# Altium PCB rf practical board.PcbDoc (part 2 of 2)
Units mm, origin at the board's own origin, x right, y up, seen from the top; angles counter-clockwise.
Board outline 70.56 x 65.43 mm, 4 copper layers (L1, L2, L3, L4), stack 0.603 mm thick; 77 components, 60 nets, 362 pads, 171 vias.
Unrouted connection lines stored in the file: 193.
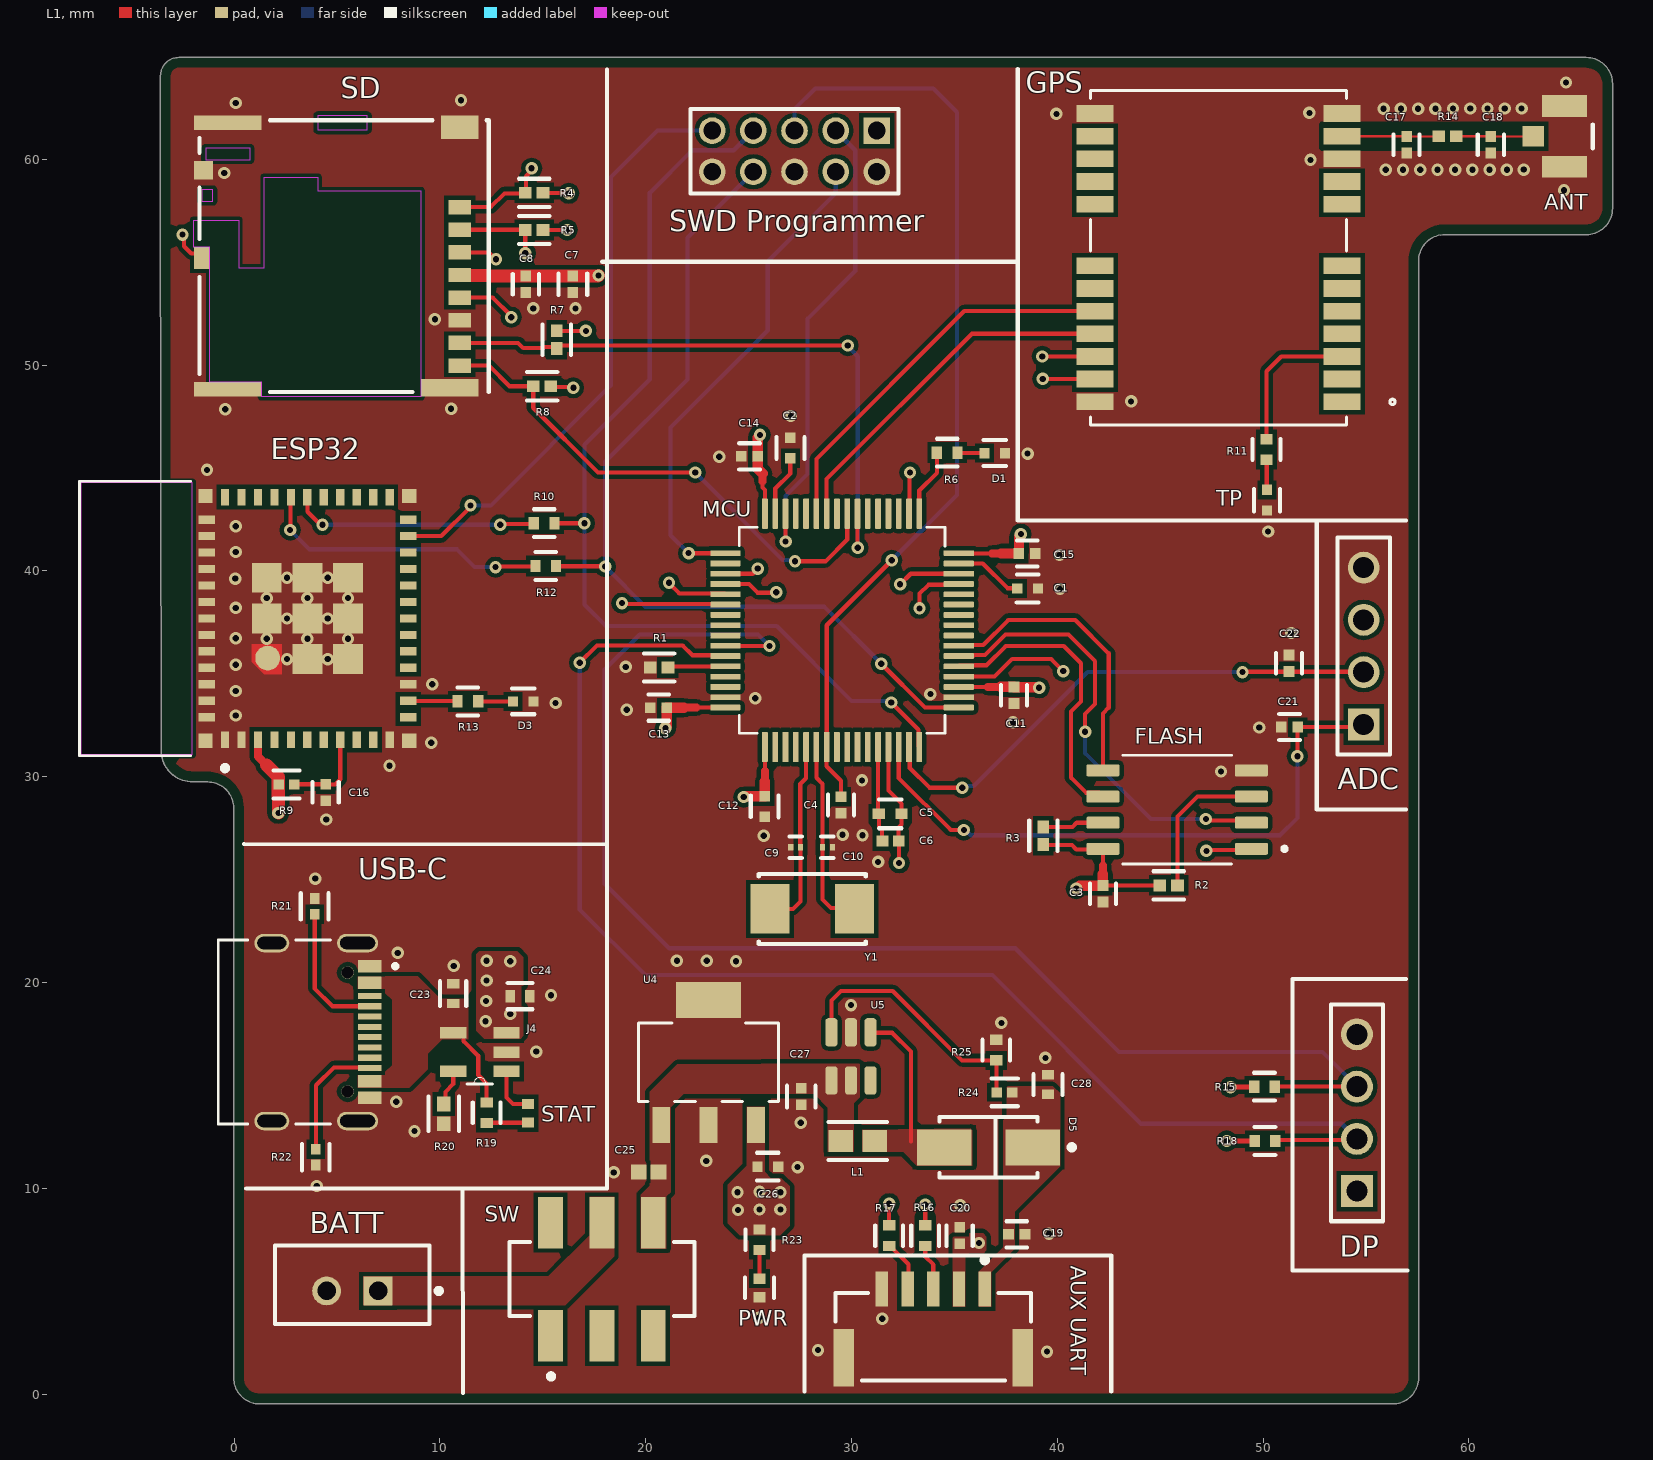
[diagram p0: L1 view]

## Via types
v1: diameter 0.6, hole 0.3, L1 to L4, tented both sides, 151 vias
v2: diameter 0.6, hole 0.3, L1 to L4, 20 vias

## Nets (pads, with @x,y where several pads share a name; then routed paths per layer and width w, separated by ;. In a path a pad name is that pad's centre, name@x,y a point inside that pad or via, vN(x,y) a via of type N, cw(c..) or ccw(c..) an arc to the next point about the centre after c; other vN are vias at no path point) (continued)
NetP3_3: (continued)
  L4 w0.203: v1(26.01,36.347) 25.451,36.906 19.71,36.906 18.009,35.205 18.009,24.79 21.138,21.661 37.952,21.661 43.002,16.612 52.883,16.612 DP.3
NetR1_1: MCU.60 R1.1 | length 2.9
  L1 w0.203: R1.1@20.952,35.306 21.005,35.359 MCU.60
NetR2_2: FLASH.3 R2.2 | length 7.3
  L1 w0.203: R2.2 45.841,28.061 46.812,29.032 FLASH.3
NetR3_2: FLASH.7 R3.2 | length 3
  L1 w0.203: R3.2 40.738,27.556 40.945,27.762 FLASH.7
NetR6_1: MCU.33 R6.1 | length 3.3
  L1 w0.203: MCU.33 33.29,43.907 34.146,44.763 R6.1
NetR11_2: GPS.3 R11.2 | length 7.3
  L1 w0.203: R11.2 50.165,49.702 50.883,50.42 GPS.3
NetR16_2: MCU.29 R16.2 | length 35.3
  L1 w0.203: v1(33.299,38.176) 33.308,38.185 33.308,38.896 33.733,39.321 35.172,39.321 MCU.29 ; R16.2@33.579,8.145 v1(33.579,9.195)
  L3 w0.203: v1(33.299,38.176) 33.299,36.093 36.428,32.964 36.428,12.044 v1(33.579,9.195)
NetR17_2: MCU.30 R17.2 | length 36.2
  L1 w0.203: R17.2 v1(31.826,9.246) ; v1(32.36,39.345) 32.874,39.859 MCU.30
  L3 w0.203: v1(31.826,9.246) 34.438,11.857 34.438,32.212 32.36,34.29 v1(32.36,39.345)
NetR24_1: R24.1 R25.2 U5.3 | length 12.7
  L1 w0.203: U5.3 29.022,19.116 29.489,19.583 32.004,19.583 35.374,16.213 R25.2 37.047,16.199 37.047,14.67 R24.1
NetU1_20: FLASH.1 MCU.20 | length 22.6
  L1 w0.203: MCU.20 36.953,34.859 37.806,35.712 39.7,35.712 v1(40.284,35.128) ; v1(47.244,26.391) 47.295,26.441 49.376,26.441 FLASH.1
  L3 w0.203: v1(40.284,35.128) 40.335,35.179 44.856,35.179 46.126,33.909 46.126,27 46.736,26.391 v1(47.244,26.391)
NetU1_21: FLASH.6 MCU.21 | length 14.4
  L1 w0.203: MCU.21 35.249,35.398 35.946,35.398 35.963,35.415 36.564,35.415 37.497,36.347 40.31,36.347 41.148,35.509 41.148,33.655 40.665,33.172 40.665,29.949 41.394,29.221 42.028,29.221 FLASH.6
NetU1_22: FLASH.2 MCU.22 | length 21.7
  L1 w0.203: MCU.22 35.249,35.898 35.946,35.898 35.963,35.915 36.489,35.915 37.481,36.906 40.538,36.906 41.834,35.611 41.834,33.528 41.351,33.045 v1(41.351,32.182) ; v1(47.219,27.94) 47.295,27.864 49.325,27.864 FLASH.2
  L4 w0.203: v1(41.351,32.182) 41.351,31.14 44.552,27.94 v1(47.219,27.94)
NetU1_23: FLASH.5 MCU.23 | length 14.3
  L1 w0.203: MCU.23 35.249,36.398 36.398,36.398 37.617,37.617 40.869,37.617 42.494,35.992 42.494,33.35 42.217,33.073 FLASH.5
NetU1_42: GPS.21 MCU.42 | length 17.6
  L1 w0.203: MCU.42 28.79,44.462 35.848,51.52 GPS.21
NetU1_43: GPS.20 MCU.43 | length 19.2
  L1 w0.203: MCU.43 28.29,45.435 35.475,52.62 GPS.20
NRST: "SWD Programmer.5" C4.2 MCU.7 | length 46
  L1 w0.203: C4.2@29.491,29.026 29.491,29.802 28.79,30.502 MCU.7 28.797,31.446 28.797,37.357 v1(31.953,40.513)
  L4 w0.203: 27.229,61.392 27.229,62.433 28.237,63.441 33.968,63.441 35.123,62.286 35.123,43.683 v1(31.953,40.513)
OSC_IN: C9.1 MCU.5 Y1.1 | length 9.2
  L1 w0.203: Y1.1@26.068,23.571 27.153,23.571 27.517,23.936 C9.1 ; C9.1@27.508,26.585 27.508,29.642 27.788,29.921 27.788,31.437 MCU.5
OSC_OUT: C10.1 MCU.6 Y1.2 | length 9.2
  L1 w0.203: MCU.6@28.293,31.414 28.296,31.411 28.296,29.947 28.591,29.651 C10.1 28.591,24.037 29.007,23.622 30.091,23.622 Y1.2
VBAT: BATT.1 C24.1 J4.3 SW.5
  other v1: 12.217,18.11 13.411,18.466 12.243,19.101 12.268,20.091 13.411,21.031 12.268,21.057
VBAT_LDO: C25.1 C27.2 L1.1 SW.6 U4.1 U5.4 U5.5
VBUS: C23.1 J4.4 R19.1 USB-C.A4_B9 USB-C.B4_A9 | length 4.3
  L1 w0.203: J4.4 10.998,17.551 11.151,17.399 11.151,17.145 11.862,16.434 11.862,15.494 12.268,15.088 R19.1
VSSA: C5.1 C6.2 MCU.12 | length 4.2
  L1 w0.203: MCU.12@31.29,30.931 31.29,28.231 C5.1 31.327,27.525 31.476,27.375 31.476,26.96 C6.2@31.563,26.873
pads on no net: ESP32.4 ESP32.5 ESP32.6 ESP32.7 ESP32.9 ESP32.10 ESP32.12 ESP32.15 ESP32.16 ESP32.17 ESP32.18 ESP32.19 ESP32.20 ESP32.21 ESP32.22 ESP32.24 ESP32.25 ESP32.26 ESP32.27 ESP32.28 ESP32.29 ESP32.32 ESP32.33 ESP32.34 ESP32.35 GPS.1 GPS.2 GPS.4 GPS.5 GPS.6 GPS.7 GPS.8 GPS.9 GPS.14 GPS.15 GPS.16 GPS.17 GPS.18 GPS.19 MCU.2 MCU.3 MCU.4 MCU.8 MCU.9 MCU.10 MCU.11 MCU.24 MCU.25 MCU.26 MCU.27 MCU.28 MCU.35 MCU.36 MCU.37 MCU.38 MCU.41 MCU.44 MCU.45 MCU.50 MCU.55 MCU.56 MCU.57 MCU.61 MCU.62 SW.1 SW.2 SW.3 SW.4 U5.6 USB-C. USB-C.A6 USB-C.A7 USB-C.A8 USB-C.B6 USB-C.B7 USB-C.B8

## Polygon pours and split planes (outlines as drawn)
GND on L1 "L1-GND" (solid, remove dead copper, pour order 43): 0.483,0.772 ccw(c1.226,0.772) 1.226,0.028 56.315,0.028 ccw(c56.315,0.762) 57.048,0.762 57.048,55.067 cw(c58.826,55.067) 58.826,56.845 65.71,56.845 ccw(c65.71,57.607) 66.472,57.607 66.472,63.678 ccw(c65.71,63.678) 65.71,64.44 -2.691,64.44 ccw(c-2.692,64.059) -3.073,64.059 -3.073,31.344 ccw(c-1.981,31.344) -1.981,30.251 -1.295,30.251 cw(c-1.295,28.473) 0.483,28.473 0.483,10.973
NetC19_1 on L1 "NONET_L-01_P-001" (solid, pour order 42): 36.17,4.242 36.17,5.944 37.363,7.137 37.363,13.31 37.541,13.487 37.541,14.91 37.592,14.961 39.776,14.961 40.132,14.605 40.132,11.074 37.922,8.865 37.922,7.061 36.779,5.918 36.779,4.242
NetC3_2 on L1 "NONET_L-01_P-001" (solid, pour order 28): 34.925,4.242 34.925,7.595 35.145,7.815 36.391,7.815 36.558,7.648 36.558,6.978 36.413,6.833 35.718,6.833 35.535,6.649 35.535,4.242
NetC3_2 on L1 "NONET_L-01_P-001" (solid, pour order 23): 24.917,11.1 23.978,10.16 23.978,8.306 24.562,7.722 26.543,7.722 27,8.179 27,10.084 26.594,10.49 26.086,10.49 25.781,10.795 25.781,13.97 24.917,13.97
VBUS on L1 "NONET_L-01_P-001" (solid, pour order 22): 5.994,19.685 7.137,19.685 7.671,19.152 7.671,15.977 7.188,15.494 5.994,15.494 5.994,14.884 8.509,14.884 9.398,15.773 9.398,16.535 10.109,17.247 11.379,17.247 11.379,19.202 10.008,19.202 8.915,20.295 5.994,20.295
VBAT on L1 "NONET_L-01_P-001" (solid, pour order 7): 6.274,4.318 9.017,4.318 16.078,4.318 18.466,6.706 18.466,9.576 17.272,9.576 17.272,7.722 15.265,5.715 7.874,5.715 6.274,5.715
NetD5_1 on L1 "NONET_L-01_P-001" (solid, pour order 15): 30.531,12.852 30.531,11.786 30.556,11.76 32.512,11.76 33.172,11.1 35.865,11.1 35.865,12.904
VBAT_LDO on L1 "L1-VBAT_LDO" (solid, pour order 14): 19.761,7.061 21.006,7.061 21.006,9.601 21.209,9.804 21.209,13.945 21.844,14.58 28.194,14.58 28.854,13.919 28.854,11.76 30.099,11.76 30.099,14.122 30.404,14.427 30.404,16.027 30.378,16.053 29.388,16.053 25.603,16.053 25.578,16.027 21.539,16.027 20.193,14.681 20.193,10.109 19.761,9.677
VBAT on L1 "NONET_L-01_P-001" (solid, pour order 5): 11.76,21.361 11.913,21.514 13.767,21.514 14.046,21.234 14.046,17.399 13.919,17.272 12.141,17.272 11.76,17.653 11.76,19.228
NetC3_2 on L3 "NONET_L-01_P-001" (solid, remove dead copper, pour order 24): 22.2,2.896 25.756,2.896 57.048,2.896 57.048,64.44 0.483,64.44 0.483,26.06 13.919,26.06 22.2,17.78
VBAT on L3 "NONET_L-01_P-001" (solid, pour order 4): 6.299,6.223 6.299,6.299 6.299,6.223 6.299,4.318 7.696,4.318 7.696,6.198 14.046,12.548 14.046,21.234 13.767,21.514 11.913,21.514 11.76,21.361 11.76,13.386 6.299,7.925 6.299,6.172
GND on L2 (split plane): 65.829,64.43 65.945,64.402 66.056,64.357 66.158,64.294 66.248,64.216 66.326,64.126 66.389,64.024 66.434,63.913 66.462,63.797 66.471,63.691 66.469,63.678 66.469,57.607 66.471,57.594 66.462,57.488 66.434,57.372 66.389,57.261 66.326,57.159 66.248,57.069 66.158,56.991 66.056,56.928 65.945,56.883 65.829,56.855 65.723,56.846 65.71,56.848 58.826,56.848 58.82,56.847 58.652,56.839 58.479,56.813 58.31,56.771 58.145,56.712 57.987,56.637 57.837,56.547 57.697,56.443 57.568,56.326 57.45,56.197 57.346,56.056 57.256,55.906 57.182,55.748 57.123,55.584 57.08,55.414 57.055,55.242 57.047,55.074 57.046,55.067 57.046,44.475 57.046,0.787 57.047,0.775 57.039,0.668 57.011,0.552 56.965,0.442 56.903,0.34 56.825,0.249 56.734,0.171 56.632,0.109 56.522,0.063 56.406,0.035 56.299,0.027 56.286,0.028 1.245,0.028 1.232,0.027 1.125,0.035 1.009,0.063 0.899,0.109 0.797,0.171 0.706,0.249 0.628,0.34 0.566,0.442 0.52,0.552 0.492,0.668 0.484,0.775 0.485,0.787 0.485,28.473 0.484,28.48 0.476,28.648 0.451,28.821 0.408,28.99 0.349,29.155 0.275,29.313 0.185,29.462 0.081,29.603 -0.037,29.732 -0.166,29.849 -0.306,29.954 -0.456,30.043 -0.614,30.118 -0.779,30.177 -0.948,30.219 -1.121,30.245 -1.289,30.253 -1.295,30.254 -2.016,30.254 -2.029,30.253 -2.15,30.261 -2.282,30.287 -2.41,30.33 -2.531,30.39 -2.643,30.465 -2.744,30.553 -2.833,30.655 -2.908,30.767 -2.967,30.888 -3.01,31.015 -3.037,31.147 -3.045,31.269 -3.043,31.282 -3.071,59.335 -3.071,64.059 -3.072,64.068 -3.065,64.133 -3.044,64.204 -3.009,64.27 -2.961,64.328 -2.904,64.375 -2.838,64.41 -2.767,64.432 -2.701,64.438 -2.692,64.437 65.71,64.437 65.723,64.439

## Other copper
L1:
  pour cut-out: 63.846,61.816 52.81,61.816 52.723,61.729 52.723,60.51 52.824,60.409 63.846,60.409

## Silkscreen, mask and mechanical layers (free items; w line width, h text height)
Top Overlay:
  lines w0.203: 0.483,26.721 18.11,26.71 ; 0.584,9.982 17.755,9.982 18.11,9.982 18.11,26.71 ; 11.1,9.931 11.125,0.051 ; 17.882,55.016 37.998,55.016 ; 18.11,64.364 18.11,26.71 ; 27.711,0.127 27.711,6.731 41.148,6.731 42.621,6.731 42.621,3.785 42.621,0.127 ; 38.075,64.389 38.075,42.443 56.947,42.443 ; 52.603,42.418 52.603,28.397 56.947,28.397 ; 56.947,20.168 51.435,20.168 51.435,5.994 57.023,5.994
Mechanical 1:
  lines w0.203: -1.295,29.743 cw(c-1.295,28.473) -0.025,28.473 -0.025,0.787 ccw(c1.245,0.787) 1.245,-0.483 56.286,-0.483 ccw(c56.286,0.787) 57.556,0.787 57.556,44.475 57.556,55.067 cw(c58.826,55.067) 58.826,56.337 65.71,56.337 ccw(c65.71,57.607) 66.98,57.607 ; -1.27,29.743 -2.016,29.743 cw(c-2.016,31.282) -3.554,31.282 -3.581,59.334 -3.581,64.059 cw(c-2.692,64.059) -2.692,64.948 -1.778,64.948 65.71,64.948 cw(c65.71,63.678) 66.98,63.678 66.98,57.531